# Altium PCB microGate.PcbDoc
Units mm, origin at the board's own origin, x right, y up, seen from the top; angles counter-clockwise.
Board outline 93.98 x 57.15 mm, 2 copper layers (Top Layer, Bottom Layer); 58 components, 45 nets, 214 pads, 108 vias.
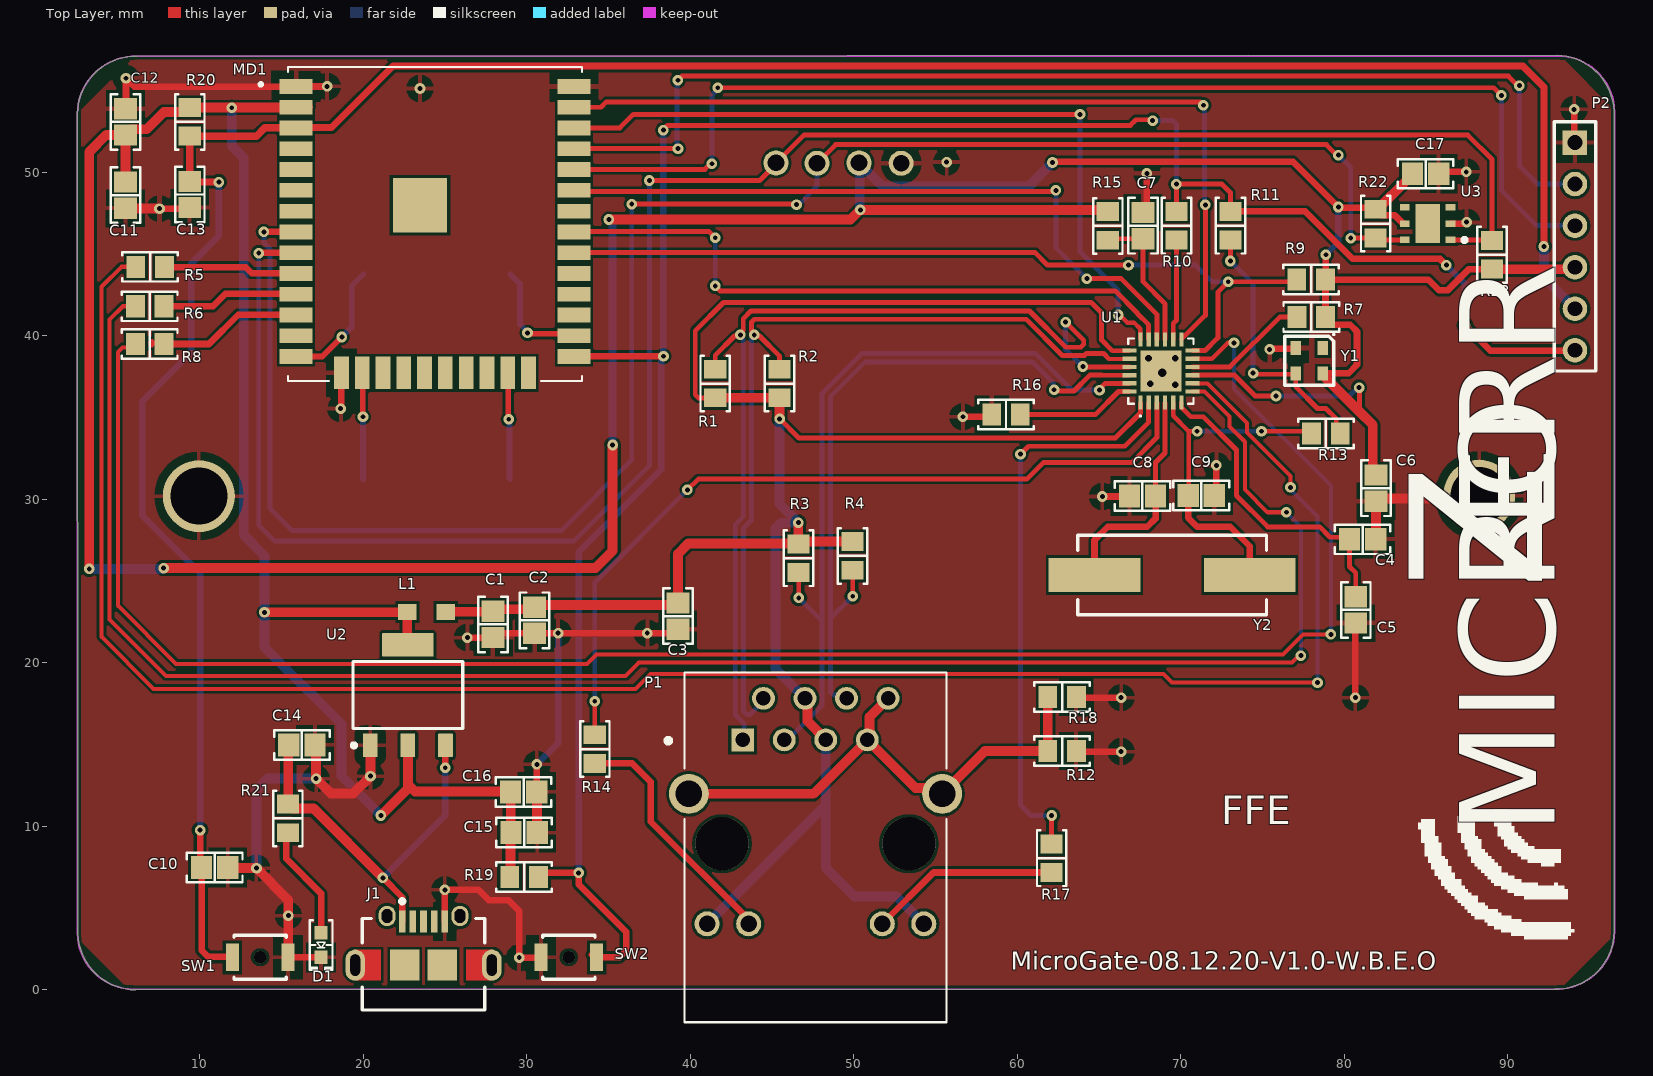
[diagram p0: Top Layer view]
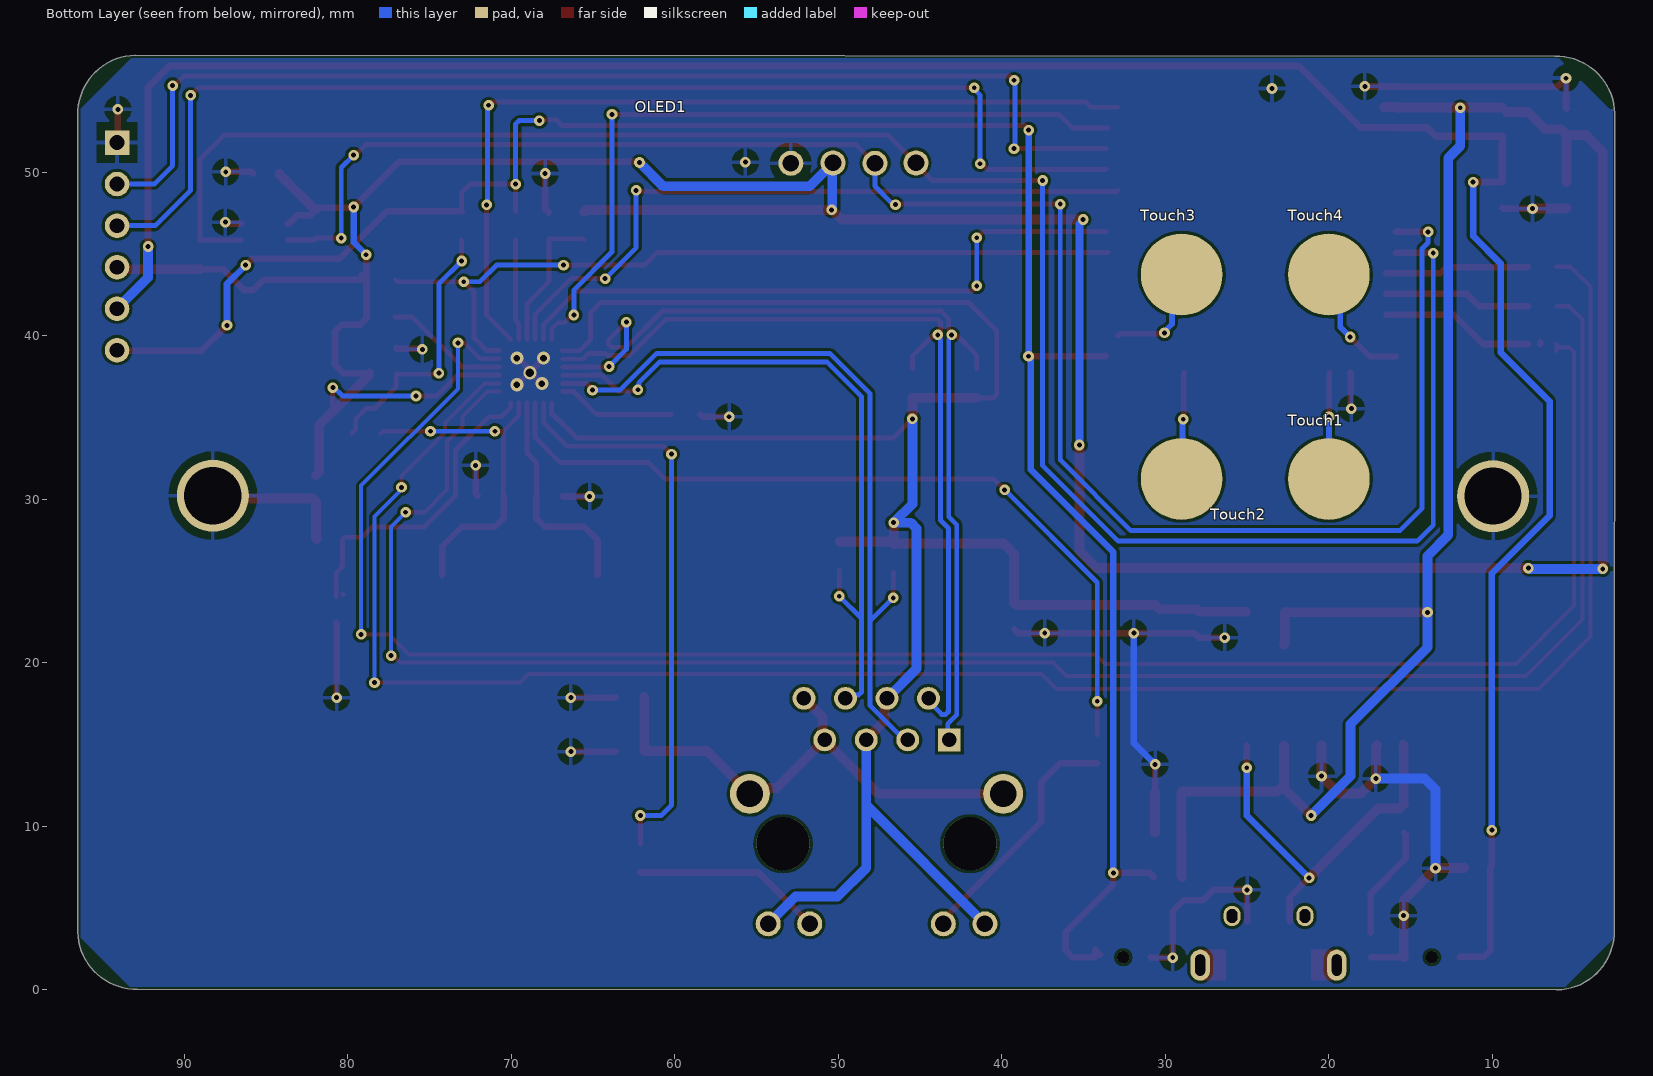
[diagram p1: Bottom Layer view, seen from below]
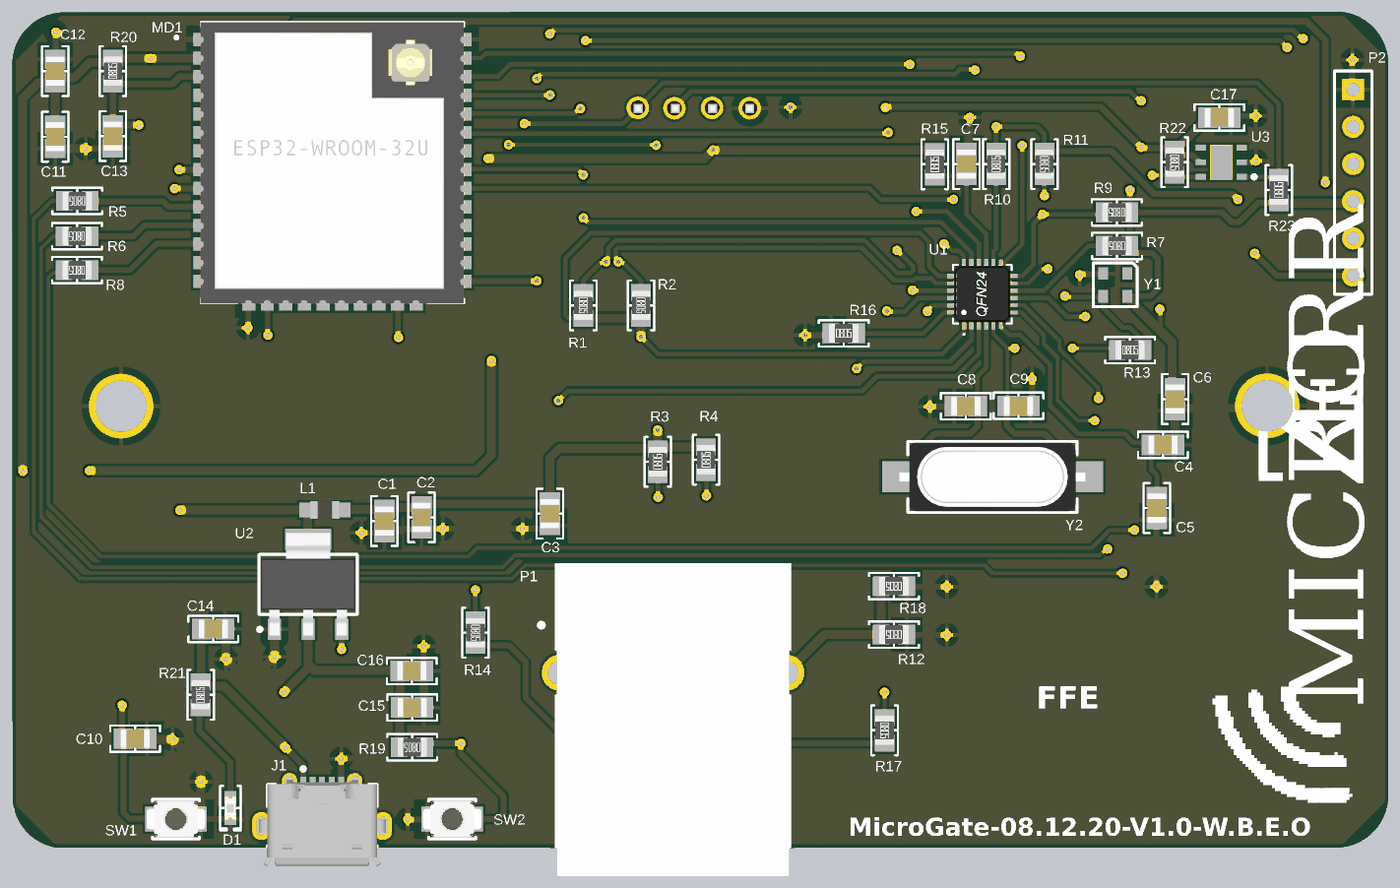
[diagram p2: 3D render of the assembled board from above, using the file's embedded part models]

## Layer stack, top to bottom
Top Solder: solder mask 0.0102, Solder Resist, Dk 3.5
Top Layer: signal copper 0.0356
Dielectric 1: dielectric 0.32, FR-4, Dk 4.8
Bottom Layer: signal copper 0.0356
Bottom Solder: solder mask 0.0102, Solder Resist, Dk 3.5

## Board outline
2.55,3.65 ccw(c6.125,3.575) 6.05,0 92.85,0.05 ccw(c92.925,3.625) 96.5,3.55 96.5,53.5 ccw(c92.925,53.575) 93,57.15 6.175,57.1 ccw(c6.1,53.525) 2.525,53.6

## Design rules (kind name [scope] priority, off if disabled: settings)
Clearance [All] p1: gap=0.175 ignorepadtopadclearanceinfootprint=FALSE except(0: Arc-Hole Track-Hole SMDPad-Hole THPad-Hole Via-Hole Fill-Hole Poly-Hole Region-Hole Text-Hole)
DiffPairsRouting [All] p1: maxlimit=0.203 minlimit=0.203 mostfreqgap=0.203 toplayer_minwidth=0.25 toplayer_maxwidth=0.3 toplayer_prefwidth=0.3 bottomlayer_minwidth=0.25 bottomlayer_maxwidth=0.3 bottomlayer_prefwidth=0.3 maxuncoupledlength=12.7
HoleSize [All] p1: absolutevalues=TRUE maxlimit=5 minlimit=0.2 maxpercent=80.000 minpercent=20.000
MatchedLengths DiffPair_diffRDMatchedLengths [InDifferentialPairClass('diffRD')] p1: tolerance=25.4 checknetsindiffpair=FALSE checkdiffpairvsdiffpair=TRUE checkxsignals=TRUE checkothers=TRUE
MinimumSolderMaskSliver [All] p1: minsoldermaskwidth=0.001
PlaneClearance [All] p1: clearance=0.5
PlaneConnect [All] p1: planeconnectstyle=Relief reliefexpansion=0.5 reliefentries=4 reliefconductorwidth=0.3 reliefairgap=0.4
PolygonConnect [All] p1: connectstyle=Relief reliefconductorwidth=0.251 reliefentries=4 polygonreliefangle="90 Angle" airgapwidth=0.5
RoutingVias [All] p1: holewidth=0.274 width=0.649 viastyle="Through Hole" minholewidth=0.3 minwidth=0.495 maxholewidth=3 maxwidth=3
SilkToSilkClearance [All] p1: silktosilkclearance=0.15
SilkToSolderMaskClearance [IsPad] p1: minsilkscreentomaskgap=0.001 clearancetoexposedcopper=TRUE
SolderMaskExpansion [All] p1: expansion=0.102 istentingtop=FALSE
Width [All] p1: maxlimit=0.6 minlimit=0.22 preferedwidth=0.4 minimp=50.000000 maximp=50.000000 favimp=50.000000
23 further rules are at their usual default settings.

## Classes and differential pairs
differential pair class diffTD: TD
differential pair class diffRD: RD
differential pair TD: +TD_P -TD_N
differential pair RD: +RD_P -RD_N

## Components (designator, comment, footprint, x,y, rotation, side; value= is the part's Value field where it differs from the comment)
C1 "104 (0.1uF" "CAP 0805_2012" 27.94,22.352 r90 top
C2 "104 (0.1uF" "CAP 0805_2012" 30.48,22.606 r90 top
C3 "0.022µF" "CAP 0805_2012" 39.243,22.86 r90 top
C4 "105 (1uF)" "CAP 0805_2012" 81.115,27.559 r180 top
C5 "470pF" "CAP 0805_2012" 80.696,23.241 r90 top
C6 "104 (0.1uF" "CAP 0805_2012" 81.94,30.683 r90 top
C7 "104 (0.1uF" "CAP 0805_2012" 67.691,46.736 r270 top
C8 "30pF" "CAP 0805_2012" 67.653,30.201 r0 top
C9 "30pF" "CAP 0805_2012" 71.247,30.226 r180 top
C10 "0.1uF" "CAP 0805_2012" 10.922,7.493 r180 top
C11 "0.22uF" "CAP 0805_2012" 5.461,48.603 r90 top
C12 "0.22uF" "CAP 0805_2012" 5.461,53.086 r270 top
C13 "0.1uF" "CAP 0805_2012" 9.398,48.641 r90 top
C14 "10uF" "CAP 0805_2012" 16.256,14.986 r180 top
C15 "10uF" "CAP 0805_2012" 29.84,9.623 r180 top
C16 "100nF" "CAP 0805_2012" 29.814,12.112 r180 top
C17 "100nF" "CAP 0805_2012" 84.963,49.911 r0 top
D1 "Green" "LED 0603_1608 GREEN" 17.425,2.75 r270 top
J1 "47589-0001" MOLX-47589-0001_V 23.691,3.024 r0 top
L1 "FB/600R/2A" SMD-0805 23.876,23.114 r0 top
MD1 "WROOM 32U" "ESP32 WROOM 32U" 14.577,36.337 r0 top
OLED1 "OLED I2C" "OLED I2C" 62.525,25.075 r180 bottom
P1 "Net_Port" HR911105A 56.933,19.695 r180 top
P2 "Header 6" HDR1X6 94.1,51.82 r270 top
R1 "49.9 R" "RES 0805_2012" 41.529,37.084 r270 top
R2 "49.9 R" "RES 0805_2012" 45.466,37.084 r270 top
R3 "49.9 R" "RES 0805_2012" 46.609,26.402 r90 top
R4 "49.9 R" "RES 0805_2012" 49.911,26.543 r90 top
R5 "100 Ohms" "RES 0805_2012" 6.973,44.221 r180 top
R6 "100 Ohms" "RES 0805_2012" 6.948,41.808 r180 top
R7 "100 Ohms" "RES 0805_2012" 77.978,41.148 r180 top
R8 "100 Ohms" "RES 0805_2012" 6.948,39.497 r180 top
R9 "4.7k R" "RES 0805_2012" 77.964,43.434 r180 top
R10 "33R" "RES 0805_2012" 69.723,46.736 r90 top
R11 "33R" "RES 0805_2012" 73.025,46.736 r270 top
R12 "33R" "RES 0805_2012" 62.738,14.605 r180 top value=0R
R13 "33R" "RES 0805_2012" 78.867,34.036 r0 top
R14 "33R" "RES 0805_2012" 34.163,14.732 r270 top value=330R
R15 "33R" "RES 0805_2012" 65.532,46.722 r90 top value="4.7k R"
R16 "33R" "RES 0805_2012" 59.309,35.179 r0 top value="12.1k R"
R17 "33R" "RES 0805_2012" 62.103,8.06 r270 top value=330R
R18 "33R" "RES 0805_2012" 62.738,17.907 r180 top value=0R
R19 "33R" "RES 0805_2012" 29.84,6.905 r180 top value="10k R"
R20 "33R" "RES 0805_2012" 9.398,53.086 r90 top value="10k R"
R21 "33R" "RES 0805_2012" 15.392,10.49 r90 top value="2k R"
R22 "33R" "RES 0805_2012" 81.915,46.863 r270 top value="4.7k R"
R23 "33R" "RES 0805_2012" 89.027,44.958 r90 top value=4.7kR
SW1 "" FP-B3U-1000P-B-MFG 13.703,2 r180 top
SW2 "" FP-B3U-1000P-B-MFG 32.575,2 r0 top
Touch1 "Touch 1" Touch#1 24.5,31.25 r90 bottom
Touch2 "Touch 1" Touch#2 29,31.25 r90 bottom
Touch3 "Touch 1" Touch#2 29,43.75 r90 bottom
Touch4 "Touch 1" Touch#2 20,43.75 r90 bottom
U1 "LAN8720" "LAN8720 FOOT" 71.45,35.179 r90 top
U2 "LM1117MP-3.3/NOPB" DCY0004A_L 22.733,18.034 r90 top
U3 "SHT20" SENS-SHT2X-6_V 85.09,46.863 r180 top
Y1 "50MHz" "ABRACON ASDMB" 77.851,38.481 r180 top
Y2 "25MHz" "ABRACON ABLS" 69.469,25.375 r0 top

## Footprints (in the part's own frame and the unit in brackets; to place one, negate y for a bottom-side part, rotate by r counter-clockwise, add the part's x,y. Pads: shape width x height; smd on the part's side, far side on the other; paste and mask are expansions set on the pad)
"ABRACON ABLS" [mm] "Crystal, 2-Leads, Body 4.70x11.40mm, Pitch 8.80mm, IPC Medium Density"
  rect 5.6x2.1 smd mask+0.01: 1(-4.75,0) 2(4.75,0)
  silkscreen extent -5.77,-2.43 5.77,2.43, body extent -6.35,-2.35 6.35,2.35, height 4.2
"ABRACON ASDMB" [mm] "MEMS Clock, 4-Leads, Body 2.00x2.45mm, Pitch 1.65mm, IPC Medium Density"
  rect 0.65x0.85 smd mask+0.01: 1(-0.825,-0.775) 2(0.825,-0.775) 3(0.825,0.775) 4(-0.825,0.775)
  silkscreen extent -1.55,-1.65 1.5,1.5, body extent -1.25,-1.05 1.25,1.05, height 0.85
"CAP 0805_2012" [mm] "Chip Capacitor, 2-Leads, Body 2.00x1.20mm, IPC Medium Density"
  rect 1.3x1.4 smd mask+0.01: 1(-0.8,0) 2(0.8,0)
  silkscreen extent -1.7,-0.9 1.7,0.9, body extent -1,-0.64 1,0.64, height 1.26
DCY0004A_L [mm] "SOT223, 4-Leads, Body 6.7x3.7mm, Pitch 2.3mm, IPC High Density"
  rrect11% 1.45x0.9 smd mask+0.01: 1(-3.075,2.3) 2(-3.075,0) 3(-3.075,-2.3)
  rrect7% 1.45x3.15 smd mask+0.01: 4(3.075,0)
  silkscreen extent -3.2,-3.35 2.05,3.42, body extent -3.5,-3.25 3.5,3.25, height 1.62
"ESP32 WROOM 32U" [mm]
  rect 2x0.9 smd mask+0.01: 1(1.316,18.908) 2(1.316,17.638) 3(1.316,16.368) 4(1.316,15.098) 5(1.316,13.828) 6(1.316,12.558) 7(1.316,11.288) 8(1.316,10.018) 9(1.316,8.748) 10(1.316,7.478) 11(1.316,6.208) 12(1.316,4.938) 13(1.316,3.668) 14(1.316,2.398) 25(18.316,2.398) 26(18.316,3.668) 27(18.316,4.938) 28(18.316,6.208) 29(18.316,7.478) 30(18.316,8.748) 31(18.316,10.018) 32(18.316,11.288) 33(18.316,12.558) 34(18.316,13.828) 35(18.316,15.098) 36(18.316,16.368) 37(18.316,17.638) 38(18.316,18.908)
  rect 0.9x2 smd mask+0.01: 15(4.101,1.398) 16(5.371,1.398) 17(6.641,1.398) 18(7.911,1.398) 19(9.181,1.398) 20(10.451,1.398) 21(11.721,1.398) 22(12.991,1.398) 23(14.261,1.398) 24(15.531,1.398)
  rect 3.33x3.33 smd mask+0.01: GND(8.9,11.65)
  silkscreen extent -0.93,0.9 18.82,20.1, body extent 0.75,0.84 18.82,20.08, height 3.4
FP-B3U-1000P-B-MFG [mm]
  rect 0.8x1.7 smd paste+0 mask+0.01: 1(-1.7,0) 2(1.7,0)
  round 0.75 hole 0.75 unplated paste-1000 mask+0.01: ""(0,0)
  silkscreen extent -1.6,-1.35 1.6,1.35, body extent -2.2,-1.45 2.2,1.45, height 0.25
HDR1X6 [mm] "Connector; Header; 6 Position"
  rect 1.5x1.5 hole 0.9 mask+0.01: 1(0,0)
  round 1.5 hole 0.9 mask+0.01: 2(2.54,0) 3(5.08,0) 4(7.62,0) 5(10.16,0) 6(12.7,0)
  silkscreen extent -1.27,-1.27 13.97,1.27
HR911105A [mm]
  rect 1.398x1.398 hole 0.89 mask+0.01: 1(13.725,4.4)
  round 1.398 hole 0.89 mask+0.01: 2(12.455,1.86) 3(11.185,4.4) 4(9.915,1.86) 5(8.645,4.4) 6(7.375,1.86) 7(6.105,4.4) 8(4.835,1.86)
  round 1.53 hole 1.02 mask+0.01: 9(15.9,15.65) 10(13.36,15.65) 11(5.19,15.65) 12(2.65,15.65)
  round 2.445 hole 1.63 mask+0.01: 13(17.02,7.7) 14(1.53,7.7)
  round 3.25 hole 3.25 unplated mask+0.01: ""(3.56,10.75) ""(14.99,10.75)
  silkscreen extent 1.27,0.27 18.42,21.67, body extent 1.33,0.2 17.21,21.6, height 13.7
"LAN8720 FOOT" [mm]
  rrect7% 0.86x0.26 smd mask+0.032: 1(0.732,3.917) 2(0.732,3.417) 3(0.732,2.917) 4(0.732,2.417) 5(0.732,1.917) 6(0.732,1.417) 13(4.602,1.417) 14(4.602,1.917) 15(4.602,2.417) 16(4.602,2.917) 17(4.602,3.417) 18(4.602,3.917)
  rrect7% 0.26x0.86 smd mask+0.032: 7(1.417,0.732) 8(1.917,0.732) 9(2.417,0.732) 10(2.917,0.732) 11(3.417,0.732) 12(3.917,0.732) 19(3.917,4.602) 20(3.417,4.602) 21(2.917,4.602) 22(2.417,4.602) 23(1.917,4.602) 24(1.417,4.602)
  rect 2.5x2.5 smd mask+0.032: 25(2.667,2.667)
  silkscreen extent -0.13,0.67 4.67,4.67, body extent 0.68,0.67 4.67,4.67, height 0.65
"LED 0603_1608 GREEN" [mm] "Chip Diode, 2-Leads, Body 1.60x0.80mm, IPC Medium Density"
  rect 0.8x0.8 smd mask+0.01: 1(-0.75,0) 2(0.75,0)
  silkscreen extent -1.52,-0.7 1.52,0.7, body extent -0.8,-0.4 0.8,0.4, height 0.53
MOLX-47589-0001_V [mm] "SMD, 5-Leads, Body 7.5x5.6mm, Pitch 0.65mm"
  rect 0.4x1.35 smd mask+0.01: 1(-1.3,1.175) 2(-0.65,1.175) 3(0,1.175) 4(0.65,1.175) 5(1.3,1.175)
  oval 1.05x1.25 hole 0.65 slot 0.85 at 90 deg mask+0.01: 6(-2.225,1.5) 7(2.225,1.5)
  oval 1.2x1.9 hole 0.6 slot 1.3 at 90 deg mask+0.01: 8(-4.175,-1.5) 11(4.175,-1.5)
  rect 1.8x1.9 smd mask+0.01: 9(-1.15,-1.5) 10(1.15,-1.5)
  Top Layer region: 2.6,-2.45 4.175,-2.45 4.175,-0.55 2.6,-0.55
  Top Layer region: -2.6,-0.55 -4.175,-0.55 -4.175,-2.45 -2.6,-2.45
  silkscreen extent -3.75,-4.25 3.75,2.52, body extent -4.32,-4.25 4.32,1.64, height 2.74
"OLED I2C" [mm]
  round 1.53 hole 1.02 mask+0.01: 1(9.627,25.476) 2(12.2,25.5) 3(14.775,25.475) 4(17.275,25.5)
  body extent 0.1,-0.05 26.8,27.81, height 7.47
"RES 0805_2012" [mm] "Chip Resistor, 2-Leads, Body 2.00x1.25mm, IPC Medium Density"
  rect 1.15x1.35 smd mask+0.01: 1(-0.875,0) 2(0.875,0)
  silkscreen extent -1.7,-0.9 1.7,0.9, body extent -1,-0.62 1,0.63, height 0.6
SENS-SHT2X-6_V [mm] "DFN, 6-Leads, Body 3x3mm, Pitch 1mm, Exposed Pad 2.4x1.5mm"
  rect 0.6x0.4 smd paste-0.6 mask+0.01: 1(-1.4,1) 2(-1.4,0) 3(-1.4,-1) 4(1.4,-1) 5(1.4,0) 6(1.4,1)
  rect 1.5x2.4 smd paste-0.05 mask+0.01: 7(0,0)
  silkscreen extent -2.38,0.88 -2.13,1.12, body extent -1.5,-1.5 1.5,1.5, height 1.1
SMD-0805 [mm] "Chip Inductor, 2-Leads, Body 2.0x1.2mm"
  rect 1.15x1 smd mask+0.01: 1(-1.175,0) 2(1.175,0)
  body extent -1,-0.6 1,0.6, height 0.89
Touch#1 [mm]
  round 5 smd mask+0.01: 1(0,-4.5)
Touch#2 [mm]
  round 5 smd mask+0.01: 1(0,0)

## Part data
C1 C2 C3 C4 C5 C6 C7 C8 C9 C10 C11 C12 C13 C14 C15 C16 C17: library part C0805C220J5RAC7800, "CAP CER SMD 0805 22PF 5% 50V X7R", Capacitance=22pF, Device Package="0805 (2012 Metric)", Manufacturer=KEMET, Operating Temperature="-55°C ~ 125°C", Supplier Part Number 1=399-17625-1-ND, Temperature Coefficient=X7R, Tolerance=±5%, Voltage - Rated=50V, Applications="Bypass, Decoupling", ComponentLink1Description=Datasheet, ComponentLink1URL=https://api.kemet.com/component-edge/download/datasheet/C0805C220J5RAC7800.pdf, ComponentLink2Description="DigiKey Link", ComponentLink2URL=http://digikey.com/product-detail/en/kemet/C0805C220J5RAC7800/399-17625-1-ND/8572625, LastUpdated="02.09.2020 01:04:09", Lifecycle Status=Active, Minimum Order=1, Mounting Type="Surface Mount, MLCC", Package / Case="0805 (2012 Metric)", Packaging=TapeAndReel, PartId=17442, Part Number=C0805C220J5RAC7800, Part Status=Active, Price=0.03, Series="SMD Comm X7R", Size / Dimension="0.079\" L x 0.049\" W (2.00mm x 1.25mm)", Supplier 1=DigiKey, Thickness (Max)="0.035\" (0.88mm)"
D1: library part BG1111C-TR, "LED GREEN DIFFUSED 1608 SMD", Current - Test=20mA, Device Package="0603 (1608 Metric)", Lens Color=White, Manufacturer="Stanley Electric Co", Millicandela Rating=2.4mcd, Supplier Device Package=1608, Supplier Part Number 1=404-1005-1-ND, Voltage - Forward (Vf) (Typ)=2.1V, Color=Green, ComponentLink1Description=Datasheet, ComponentLink1URL=http://www.stanley-components.com/php/downloaddatafile.php?rp=h1111c_e.pdf, ComponentLink2Description="DigiKey Link", ComponentLink2URL=http://digikey.com/product-detail/en/stanley-electric-co/BG1111C-TR/404-1005-1-ND/428888, Configuration=Standard, Height (Max)=0.90mm, LastUpdated="02.09.2020 01:20:42", Lens Size="1.10mm x 0.80mm", Lens Style="Rectangle with Flat Top", Lens Transparency=Diffused, Lifecycle Status=Active, Minimum Order=1, Mounting Type="Surface Mount", Package / Case="0603 (1608 Metric)", Packaging=TapeAndReel, PartId=669, Part Number=BG1111C-TR, Part Status=Active, Price=0.09, Series=1111C, Size / Dimension="1.60mm L x 0.80mm W", Supplier 1=DigiKey, Viewing Angle="153°, 146°", Wavelength - Dominant=558nm, Wavelength - Peak=555nm
J1: library part CMP-2000-05610-1, "Right Angle Female Type AB Micro USB Connector, 30 V, 1.8 A, -30 to 85 degC, RoHS, Tape and Reel", Color=Black, Current Rating=1.8A, Manufacturer=Molex, Operating Temperature Range=-20Cto+85C, Package Description="Micro USB Connector, Pitch 0.65 mm, 5 Positions, Body 7.5 x 5.6 mm", Voltage Rating=30VAC, =0475890001, Brand=Molex, Connector Type=MicroUSBTypeABreceptacle, Contact Material=CopperAlloy, Contact Plating=Gold, Datasheet URL=http://www.molex.com/webdocs/datasheets/pdf/en-us/0475890001_IO_CONNECTORS.pdf, Datasheet Version=12/2016, Gender=Female, Manufacturer URL=http://www.molex.com/, Mounting Angle=Right, Mounting Technology=SurfaceMount, Number of Contacts=5Contact, Number of Ports=1Port, Package Reference=47589-0001, Package URL=http://www.molex.com/pdm_docs/sd/475890001_sd.pdf, Packaging=Reel, Product=MicroUSBTypeABConnectors, Product Category=USBConnectors, RoHS=True, Series=47589, Standard=USB, Termination Style=SMD/SMT
L1: library part CMP-0220-00032-1, "İsmi : 742792040 SMD EMI Suppression Ferrite Bead WE-CBF, Z = 600 Ohm", ComponentLink1Description="Manufacturer Link", ComponentLink1URL=http://www.we-online.com, ComponentLink2Description=Datasheet, ComponentLink2URL=http://www.we-online.de/katalog/media/pdf/742792040.pdf, DatasheetVersion=Dec-2005, Impedance="600 Ohm", PackageDescription="Chip Inductor, 2-Leads, Body 2.0 x 1.2 mm", PackageReference=SMD-0805, PackageVersion=2005
MD1: library part "ESP32 WROOM 32U"
P1: library part HR911105A
P2: "Header, 6-Pin", LatestRevisionDate=17-Jul-2002, LatestRevisionNote="Re-released for DXP Platform.", Publisher="Altium Limited"
R1 R2 R3 R4 R9 R10 R11 R12 R13 R14 R15 R16 R17 R18 R19 R20 R21 R22 R23: library part RPC0805JT100R-UP, "RES, PULSE, 0805, 5%, 100 OHM, 0", Device Package="0805 (2012 Metric)", Manufacturer="Stackpole Electronics Inc", Operating Temperature="-55°C ~ 155°C", Power (Watts)="0.5W, 1/2W", Ratings=AEC-Q200, Resistance="100 Ohms", Supplier Device Package=0805, Supplier Part Number 1=RPC0805JT100R-UPCT-ND, Temperature Coefficient=±200ppm/°C, Tolerance=±5%, ComponentLink1Description=Datasheet, ComponentLink1URL=https://www.seielect.com/catalog/sei-rpc.pdf, ComponentLink2Description="DigiKey Link", ComponentLink2URL=http://digikey.com/product-detail/en/stackpole-electronics-inc/RPC0805JT100R-UP/RPC0805JT100R-UPCT-ND/10109071, Composition="Thick Film", Features="Automotive AEC-Q200, Pulse Withstanding", Height - Seated (Max)="0.024\" (0.60mm)", LastUpdated="02.09.2020 01:15:08", Lifecycle Status=Active, Minimum Order=1, Number of Terminations=2, Package / Case="0805 (2012 Metric)", Packaging=TapeAndReel, PartId=35188, Part Number=RPC0805JT100R-UP, Part Status=Active, Price=0.02, Series=RPC, Size / Dimension="0.079\" L x 0.049\" W (2.00mm x 1.25mm)", Supplier 1=DigiKey
R5 R6 R7 R8: library part RPC0805JT100R-UP, "RES, PULSE, 0805, 5%, 100 OHM, 0", Device Package="0805 (2012 Metric)", Manufacturer="Stackpole Electronics Inc", Operating Temperature="-55°C ~ 155°C", Power (Watts)="0.5W, 1/2W", Ratings=AEC-Q200, Supplier Device Package=0805, Supplier Part Number 1=RPC0805JT100R-UPCT-ND, Temperature Coefficient=±200ppm/°C, Tolerance=±5%, ComponentLink1Description=Datasheet, ComponentLink1URL=https://www.seielect.com/catalog/sei-rpc.pdf, ComponentLink2Description="DigiKey Link", ComponentLink2URL=http://digikey.com/product-detail/en/stackpole-electronics-inc/RPC0805JT100R-UP/RPC0805JT100R-UPCT-ND/10109071, Composition="Thick Film", Features="Automotive AEC-Q200, Pulse Withstanding", Height - Seated (Max)="0.024\" (0.60mm)", LastUpdated="02.09.2020 01:15:08", Lifecycle Status=Active, Minimum Order=1, Number of Terminations=2, Package / Case="0805 (2012 Metric)", Packaging=TapeAndReel, PartId=35188, Part Number=RPC0805JT100R-UP, Part Status=Active, Price=0.02, Resistance="100 Ohms", Series=RPC, Size / Dimension="0.079\" L x 0.049\" W (2.00mm x 1.25mm)", Supplier 1=DigiKey
SW1 SW2: library part CMP-08834-000005-1, "SWITCH TACTILE SPST-NO 0.05A 12V", Ambient Temperature Range High=+70°C, Ambient Temperature Range Low=-25°C, Contact Current Rating=50mA, Contact Resistance=100m?, Manufacturer=Omron, Manufacturer Part Number=B3U-1000P-B, Operating Force=1.5N, Package=0, Temperature="-25°C to +70°C", Voltage Rating Dc=12V, Automotive=No, Category=Switch, ComponentLink2Description=Datasheet, ComponentLink2URL=https://omronfs.omron.com/en_US/ecb/products/pdf/en-b3u.pdf, Device Class L1=Electromechanical, Device Class L2=Switches, Device Class L3="Tactile Switches", Digikey Description="SWITCH TACTILE SPST-NO 0.05A 12V", Electromechanical Life=200000Cycles, Height=1.75mm, Lead Free=Yes, Mount="Surface Mount", Mouser Description="Tactile Switches Top Actuated with boss w/o ground", Octopart=https://octopart.com/b3u-1000p-b-omron-1057356, RoHS=TRUE, Temperature Range High=+70°C, Temperature Range Low=-25°C, Throw Configuration=SPST-NO
U2: library part CMP-0062-01638-4, "800mA Low-Dropout Linear Regulator, 4-pin SOT-223, Pb-Free", Manufacturer="Texas Instruments", PackageTopMarking=XYTT*N05A, PowerWise=N, Code_IPC=SOT223-4, Code_JEDEC=TO-261-AA, ComponentLink1Description="Datasheet URL", ComponentLink1URL=http://www.ti.com/general/docs/lit/getliterature.tsp?genericPartNumber=LM1117-N&fileType=pdf, CompType="LDO IC", High-Reliability=Y, PackageDescription="Molded SOT-223, 6.50 x 3.56 x 1.6mm Body, 4 Lead, 2.3mm Pitch", PackageReference=DCY0004A, PartNumber=LM1117MP-3.3/NOPB, PinCount=4, RoHS=Y
U3: library part CMP-2000-05344-1, "Humidity and Temperature Sensor IC, 2.1 to 3.6 V, -40 to 125 degC, 6-Pin DFN, RoHS, Tape and Reel", Manufacturer=Sensirion-AG, Operating Temperature=-40degC~125degC, Voltage - Supply=2.1V~3.6V, Accuracy=±3%RH, Category=Sensors,Transducers, Datasheet URL=http://datasheet.octopart.com/SHT20-Sensirion-datasheet-32015022.pdf, Datasheet Version="Rev. 4, 05/2014", Family=Humidity,MoistureSensors, Humidity Range=0~100%RH, Manufacturer URL=http://www.sensirion.com/, Mounting Type=SurfaceMount, Output=12b, Output Type=I²C, Response Time=8s, Sensitivity=-, Sensor Type=Humidity,Temperature, Series=-
Y1: library part ASDMB-50.000MHZ-EC-T, "MEMS OSC XO 50.0000MHZ LVCMOS", Current - Supply (Max)=16mA, Frequency Stability=±50ppm, Manufacturer="Abracon LLC", Operating Temperature="-20°C ~ 70°C", Package / Case="4-SMD, No Lead", Supplier Part Number 1=535-12143-1-ND, Voltage - Supply="1.8V ~ 3.3V", Base Resonator=MEMS, ComponentLink1Description=Datasheet, ComponentLink1URL=https://abracon.com/Oscillators/ASDMB.pdf, ComponentLink2Description="DigiKey Link", ComponentLink2URL=http://digikey.com/product-detail/en/abracon-llc/ASDMB-50.000MHZ-EC-T/535-12143-1-ND/4199768, Frequency=50MHz, Function="Standby (Power Down)", Height - Seated (Max)="0.035\" (0.90mm)", LastUpdated="02.09.2020 01:21:50", Lifecycle Status=Active, Minimum Order=1, Mounting Type="Surface Mount", Output=LVCMOS, Packaging=TapeAndReel, PartId=65, Part Number=ASDMB-50.000MHZ-EC-T, Part Status=Active, Price=1.35, Series="ASDMB, Pure Silicon™", Size / Dimension="0.098\" L x 0.079\" W (2.50mm x 2.00mm)", Supplier 1=DigiKey, Type="XO (Standard)"
Y2: library part ABLS-25.000MHZ-D-FT, "CRYSTAL 25.000MHZ 18PF SMD", ESR (Equivalent Series Resistance)="40 Ohms", Frequency Stability=±50ppm, Load Capacitance=18pF, Manufacturer="Abracon LLC", Operating Mode=Fundamental, Operating Temperature="-40°C ~ 85°C", Package / Case=HC-49/US, Supplier Part Number 1=535-14356-1-ND, ComponentLink1Description=Datasheet, ComponentLink1URL=https://abracon.com/Resonators/abls.pdf, ComponentLink2Description="DigiKey Link", ComponentLink2URL=http://digikey.com/product-detail/en/abracon-llc/ABLS-25.000MHZ-D-FT/535-14356-1-ND/8582117, Frequency=25MHz, Frequency Tolerance=±50ppm, Height - Seated (Max)="0.165\" (4.20mm)", LastUpdated="02.09.2020 01:21:46", Lifecycle Status=Active, Minimum Order=0, Mounting Type="Surface Mount", Packaging=TapeAndReel, PartId=19, Part Number=ABLS-25.000MHZ-D-FT, Part Status=Active, Price=0.18, Series=ABLS, Size / Dimension="0.449\" L x 0.185\" W (11.40mm x 4.70mm)", Supplier 1=DigiKey, Type="MHz Crystal"

## Free pads (board coordinates)
  round 4.4 hole 3.5 mask+0.01: 1(9.957,30.201) 1(88.24,30.226)

## Via types
v1: diameter 0.649, hole 0.3, Top Layer to Bottom Layer, 103 vias
v2: diameter 0.8, hole 0.4, Top Layer to Bottom Layer, 4 vias
v3: diameter 0.8, hole 0.5, Top Layer to Bottom Layer, 1 vias

## Nets (pads, with @x,y where several pads share a name; then routed paths per layer and width w, separated by ;. In a path a pad name is that pad's centre, name@x,y a point inside that pad or via, vN(x,y) a via of type N, cw(c..) or ccw(c..) an arc to the next point about the centre after c; other vN are vias at no path point)
3.3V: C6.2 C11.2 C12.2 C15.2 C16.2 C17.1 L1.1 MD1.2 OLED1.2 P2.4 R7.1 R9.1 R15.2 R19.2 R20.2 R22.1 R23.1 U1.9 U2.2 U2.4 U3.5 Y1.4 | length 293.1
  Top Layer w0.305: U1.9 70.722,37.592 73.279,37.592 74.549,36.322 v1(75.819,36.322) ; v1(80.899,36.83) 80.937,36.792 80.937,35.345
  Top Layer w0.4: v1(62.155,50.598) 62.207,50.65 76.858,50.65 v1(79.629,47.879) 79.677,47.831 81.822,47.831 R22.1 82.29,47.363 83.09,47.363 83.59,46.863 U3.5 ; Y1.4 78.689,37.719 80.264,37.719 80.772,38.227 80.772,40.259 80.358,40.673 79.228,40.673 78.846,41.055 78.846,43.427 R9.1 ; v1(78.867,44.958) 78.853,44.944 R9.1@78.853,43.448 ; R9.1@79.127,43.722 R9.1@78.853,43.448 ; R23.1 87.619,44.083 86.309,42.774 85.801,42.774 85.141,43.434 R9.1 ; R9.1 R9.1@78.853,43.448
  Top Layer w0.6: v1(3.25,25.75) 3.25,51.25 4.286,52.286 C12.2 ; C11.2 C12.2 ; v1(7.8,25.8) 34.2,25.8 35.255,26.855 v1(35.255,33.325) ; R20.2@9.123,53.686 7.823,53.686 6.773,52.636 5.811,52.636 C12.2 ; R20.2 9.404,53.955 11.958,53.955 v1(11.963,53.95) 11.973,53.959 15.854,53.959 15.893,53.999 16.628,53.999 MD1.2@16.636,54.006 ; v1(13.97,23.089) 13.979,23.098 22.685,23.098 L1.1 22.701,21.141 U2.4 ; v1(21.082,10.668) 22.733,12.319 22.733,12.573 ; U2.2 22.733,12.573 ; R19.2 29.002,6.942 29.002,9.61 29.027,9.635 29.027,12.099 C16.2 28.963,12.061 28.884,12.141 23.165,12.141 22.733,12.573 ; v1(35.027,47.117) 49.804,47.117 50.387,47.7 v1(50.4,47.7) 50.409,47.691 65.438,47.691 R15.2 ; Y1.4 78.676,37.606 80.937,35.345 81.737,34.545 81.737,31.686 C6.2 ; R22.1 82.015,47.738 83.788,49.511 83.813,49.511 84.163,49.861 C17.1 ; R23.1 89.041,44.069 93.969,44.069 P2.4
  Bottom Layer w0.305: v1(75.819,36.322) 80.301,36.322 80.809,36.83 v1(80.899,36.83)
  Bottom Layer w0.4: OLED1.2 OLED1.2@50.363,50.537 ; v1@50.363,47.738 v1(50.4,47.7) ; v1(78.867,44.958) 79.629,45.72 v1(79.629,47.879)
  Bottom Layer w0.5: v1(35.027,47.117) 35.027,47.077 35.255,46.848 v1(35.255,33.325)
  Bottom Layer w0.6: v1(3.25,25.75) 7.75,25.75 v1(7.8,25.8) ; v1(11.963,53.95) 11.963,51.613 12.7,50.876 12.7,27.813 13.97,26.543 v1(13.97,23.089) 13.97,20.955 18.669,16.256 18.669,13.081 v1(21.082,10.668) ; v1@50.363,47.738 50.363,50.537 51.758,49.142 60.699,49.142 v1(62.155,50.598)
3.3VLAN: C1.2 C2.2 C3.2 L1.2 P1.4 P1.5 P1.9 P1.12 R1.2 R2.2 R3.2 R4.2 U1.1 U1.19 | length 141.5
  Top Layer w0.3: R1.2 40.499,36.209 40.308,36.4 40.308,40.308 42.037,42.037 64.516,42.037 65.151,41.402 65.151,39.751 65.811,39.091 66.843,39.091 U1.19 ; v1(45.466,34.925) 46.641,33.75 66,33.75 67.533,35.283 U1.1
  Top Layer w0.6: L1.2 25.07,23.133 27.921,23.133 C1.2 28.067,23.279 30.353,23.279 C2.2 30.607,23.533 39.116,23.533 C3.2 39.243,26.67 39.878,27.305 46.581,27.305 R3.2 ; R1.2 R2.2 v1(45.466,34.925) ; v1(46.609,28.575) R3.2 ; P1.4 47.171,17.683 47.171,16.439 48.288,15.322 P1.5 ; R4.2 46.75,27.418 R3.2
  Bottom Layer w0.6: P1.9 48.288,11.3 ; v1(45.466,34.925) 45.466,29.718 v1(46.609,28.575) 45.563,28.575 45.212,28.224 45.212,19.641 P1.4 ; P1.5 48.288,11.3 ; P1.12 52.613,5.715 50.038,5.715 48.288,7.465 48.288,11.3
5V: C14.2 J1.1 R21.2 U2.3 | length 24.2
  Top Layer w0.4: v1(21.209,6.858) 22.391,5.676 J1.1 ; v1(25.019,13.589) 25.026,13.596 25.026,14.952 U2.3
  Top Layer w0.6: C14.2 15.424,14.954 15.424,11.397 R21.2 15.667,11.09 16.977,11.09 v1(21.209,6.858)
  Bottom Layer w0.4: v1(21.209,6.858) 25.019,10.668 v1(25.019,13.589)
CRS_DV: MD1.12 R8.1 | length 9.5
  Top Layer w0.4: 7.073,39.497 7.073,39.597 ; R8.1 7.826,39.5 10.568,39.5 12.358,41.29 MD1.12@16.5,41.29
EN: C10.2 C13.2 MD1.3 P2.5 R20.1 SW1.2 | length 156.3
  Top Layer w0.4: v1(10.033,9.779) 10.033,7.582 C10.2 10.122,2.428 10.525,2.025 11.978,2.025 SW1.2
  Top Layer w0.45: v1(11.176,49.403) 9.436,49.403 C13.2 R20.1 13.476,52.211 13.985,52.72 MD1.3@15.757,52.72 ; MD1.3@15.893,52.736 18.065,52.736 21.829,56.5 90.9,56.5 92.202,55.198 v1(92.202,45.466)
  Bottom Layer w0.4: v1(10.033,9.779) 10.033,25.467 6.5,29 6.5,36 9.5,39 9.5,44.425 11.176,46.101 v1(11.176,49.403)
  Bottom Layer w0.6: v1(92.202,45.466) 92.202,43.558 P2.5
ESP_IO0: MD1.25 P2.6 R10.2 R11.1 R19.1 SW2.2 | length 131.5
  Top Layer w0.3: v1(38.354,52.578) 38.354,52.611 38.611,52.869 66.915,52.869 67.259,53.213 68.224,53.213 v1(68.275,53.162)
  Top Layer w0.305: R10.2 v1(69.723,49.276) 72.517,49.276 73.025,48.768 R11.1
  Top Layer w0.4: R19.1 30.973,7.163 v1(33.172,7.163) 33.172,6.468 36.075,3.565 36.075,2.4 35.675,2 SW2.2 34.275,2.45 SW2.2@33.984,2.159 ; MD1.25@33.636,38.766 33.644,38.759 38.355,38.759 v1(38.363,38.751) ; R11.1 77.611,47.611 80.518,44.704 85.852,44.704 v1(86.233,44.323) ; v1(87.376,40.64) 88.916,39.1 94.08,39.1 P2.6
  Bottom Layer w0.3: v1(68.275,53.162) 69.52,53.162 69.723,52.959
  Bottom Layer w0.305: v1(69.723,49.276) 69.723,52.959
  Bottom Layer w0.4: v1(33.172,7.163) 33.172,26.772 38.227,31.826 v1@38.227,38.735 ; v1(38.354,52.578) 38.359,52.573 38.359,38.755 v1(38.363,38.751) ; v1(86.233,44.323) 87.376,43.18 v1(87.376,40.64)
ESP_RX: MD1.34 P2.3 | length 71.9
  Top Layer w0.3: MD1.34@33.636,50.196 33.651,50.181 40.892,50.181 41.231,50.521 v1(41.326,50.521) ; v1(41.681,55.169) 42.469,55.169 89.131,55.169 v1(89.6,54.7)
  Bottom Layer w0.3: v1(41.326,50.521) 41.326,54.719 41.681,55.074 v1(41.681,55.169) ; v1(89.6,54.7) 89.6,48.9 91.76,46.74 P2.3
ESP_TX: MD1.35 P2.2 | length 70.4
  Top Layer w0.3: MD1.35@33.636,51.466 33.651,51.451 v1(39.252,51.451) ; v1(39.243,55.626) 39.497,55.88 90.026,55.88 90.606,55.3 v1(90.7,55.3)
  Bottom Layer w0.3: v1@39.116,51.435 39.179,51.498 39.179,55.562 v1(39.243,55.626) ; v1(90.7,55.3) 90.7,50.4 91.82,49.28 P2.2
GND: C1.1 C2.1 C3.1 C4.1 C5.1 C6.1 C7.1 C8.1 C9.1 C10.1 C11.1 C12.1 C13.1 C14.1 C15.1 C16.1 C17.2 D1.2 J1.5 MD1.1 MD1.15 MD1.38 OLED1.1 P2.1 pad.1 R12.1 R16.1 R18.1 SW1.1 SW2.1 U1.25 U2.1 U3.2 Y1.2 | length 122.2
  Top Layer w0.4: C12.1 5.5,53.925 v1(5.5,55.75) 6.005,55.245 MD1.1 15.895,55.247 17.797,55.247 v1(17.8,55.25) ; v1(7.55,47.775) 9.332,47.775 C13.1 ; SW1.1 D1.2 ; v1(18.625,35.55) 18.651,35.576 18.651,37.708 MD1.15 ; J1.5 24.991,6.116 v1(25,6.125) 27.05,6.125 27.675,5.5 28.875,5.5 29.542,4.833 v1(29.542,1.975) 30.85,1.975 SW2.1 ; v1(26.375,21.55) 27.938,21.55 C1.1 28.194,21.806 C2.1 30.499,21.825 v1(31.925,21.825) v1(37.37,21.825) 39.008,21.825 C3.1 ; C16.1 30.625,12.123 v1(30.625,13.8) ; v1(56.675,35.05) 58.305,35.05 R16.1 ; R12.1 63.643,14.575 v1(66.35,14.575) ; R18.1 63.645,17.875 v1(66.35,17.875) ; v1(65.2,30.175) 66.827,30.175 C8.1 ; C7.1 67.925,47.77 v1(67.925,49.925) ; v2(68.021,38.633) 68.021,38.608 U1.25 ; v2(68.123,37.084) U1.25@68.783,37.744 ; U1.25@68.809,37.846 v2(69.647,37.008) ; v3(68.859,37.744) 68.859,37.77 U1.25 ; v2(69.647,38.633) 69.571,38.633 U1.25 ; C9.1 72.175,30.354 v1(72.175,32.075) ; v1(75.425,39.175) 75.466,39.215 76.986,39.215 Y1.2 ; v1(80.675,17.875) 80.675,22.42 C5.1 ; C4.1@81.9,27.574 C4.1 ; C17.2 85.877,50.025 v1(87.45,50.025) ; U3.2 87.321,46.863 87.408,46.95 v1(87.475,46.95) ; v1(94.05,53.85) 94.05,51.87 P2.1
  Top Layer w0.6: C11.1 5.48,47.784 7.541,47.784 v1(7.55,47.775) ; C10.1 11.756,7.459 13.466,7.459 v1(13.475,7.45) 15.416,5.509 15.416,2.013 SW1.1 ; C14.1 17.116,14.926 17.116,12.934 v1(17.125,12.925) 18.036,12.014 19.389,12.014 20.442,13.067 20.442,14.95 U2.1 ; C16.1 30.627,12.099 30.627,9.635 C15.1 ; C4.1@81.9,27.574 81.928,27.602 81.928,29.87 C6.1 82.112,30.055 88.068,30.055 pad.1@88.24,30.226
  Bottom Layer w0.4: v1(30.625,13.8) 31.925,15.1 v1(31.925,21.825)
  Bottom Layer w0.6: v1(13.475,7.45) 13.475,12.256 14.148,12.929 17.121,12.929 v1(17.125,12.925)
  other v1: 15.425,4.55 20.45,13.075 55.675,50.625 23.475,55.125
GND_J48: P1.7 P1.8 P1.13 P1.14 R12.2 R18.2 | length 32.1
  Top Layer w0.6: P1.13 47.528,11.995 P1.7 ; P1.8 50.967,16.705 50.967,15.435 P1.7 ; R18.2 R12.2 58.013,14.605 P1.14 55.05,12.348 53.775,12.348 P1.7
"IO2 / TOUCH_1": MD1.24
"IO4 / TOUCH_2": MD1.26 Touch3.1 | length 6.9
  Top Layer w0.35: v1(30.048,40.183) 30.105,40.126 32.772,40.126 MD1.26
  Bottom Layer w0.35: Touch3.1 29.587,43.163 29.587,40.725 30.048,40.264 v1(30.048,40.183)
"IO12 / TOUCH_3": MD1.14 Touch4.1 | length 7.7
  Top Layer w0.35: MD1.14 17.501,38.735 v1(18.694,39.929)
  Bottom Layer w0.35: v1(18.694,39.929) 19.295,40.53 19.295,43.045 Touch4.1
"IO13 / TOUCH_4": MD1.16 Touch1.1 | length 6.5
  Top Layer w0.35: MD1.16 19.969,37.714 19.969,35.073 v1(19.99,35.052)
  Bottom Layer w0.35: v1(19.99,35.052) 19.995,35.047 19.995,31.255 Touch1.1
"IO14 / TOUCH_5": MD1.13
"IO15 / TOUCH_6": MD1.23 Touch2.1 | length 6.6
  Top Layer w0.35: MD1.23 28.872,37.701 28.872,34.933 v1(28.905,34.9)
  Bottom Layer w0.35: v1(28.905,34.9) 28.953,34.852 28.953,31.297 Touch2.1
LED1: R14.1 U1.3 | length 49.5
  Top Layer w0.3: R14.1 v1(34.163,17.653) ; v1(39.827,30.582) 40.488,31.242 60.579,31.242 61.587,32.25 67,32.25 68.533,33.783 U1.3
  Bottom Layer w0.3: v1(34.163,17.653) 34.163,24.917 v1(39.827,30.582)
LED2: R17.1 U1.2 | length 35.2
  Top Layer w0.3: v1(60.198,32.766) 60.682,33.25 66.568,33.25 68.033,34.715 U1.2 ; R17.1 v1(62.103,10.668)
  Bottom Layer w0.3: v1(60.198,32.766) 60.198,11.303 60.833,10.668 v1(62.103,10.668)
MDC: MD1.37 U1.13 | length 53.7
  Top Layer w0.3: MD1.37 34.544,53.975 34.874,54.305 71.171,54.305 v1(71.374,54.102) ; U1.13 71.501,41.249 v1(71.501,48.006)
  Bottom Layer w0.3: v1(71.374,54.102) 71.438,54.038 71.438,48.069 v1(71.501,48.006)
MDIO: MD1.30 R9.2 U1.12 | length 49.9
  Top Layer w0.3: MD1.30@33.5,45.1 33.515,45.085 61.087,45.085 61.849,44.323 v1(66.802,44.323) ; U1.12 70.728,39.106 71.495,39.106 72.263,39.874 72.263,42.672 v1(72.898,43.307) 76.962,43.307 R9.2
  Bottom Layer w0.3: v1(66.802,44.323) 70.899,44.323 71.915,43.307 v1(72.898,43.307)
NetC4_2: C4.2 C5.2 U1.6 | length 19.3
  Top Layer w0.28: U1.6 70.033,35.631 70.612,35.052 70.632,35.052
  Top Layer w0.3: 70.632,35.052 71.374,35.052 73.406,33.02 73.406,30.226 75.311,28.321 78.486,28.321 79.121,27.686 80.188,27.686 C4.2 80.315,25.882 80.696,25.502 C5.2 ; C5.2@80.264,24.168 C5.2@80.315,24.219
NetC8_2: C8.2 U1.4 Y2.1 | length 13.7
  Top Layer w0.3: C8.2 68.453,32.258 69.033,32.838 U1.4
  Top Layer w0.4: Y2.1 64.719,27.508 65.532,28.321 67.945,28.321 68.453,28.829 C8.2
NetC9_2: C9.2 R13.1 U1.5 Y2.2 | length 21.3
  Top Layer w0.254: U1.5 69.536,35.908 69.536,35.112 70.485,34.163 ; C9.2 70.485,30.264 70.485,34.163 ; v1(70.993,34.163) 70.485,34.163 ; v1(74.93,34.163) 77.865,34.163 R13.1
  Top Layer w0.4: C9.2 70.447,28.867 70.993,28.321 73.025,28.321 74.219,27.127 Y2.2
  Bottom Layer w0.254: v1(70.993,34.163) v1(74.93,34.163)
NetD1_1: D1.1 R21.1 | length 7
  Top Layer w0.4: R21.1 15.291,9.514 15.291,8.034 17.425,5.9 D1.1
NetP1_10: P1.10 R14.2 | length 15.1
  Top Layer w0.4: R14.2 36.455,13.857 37.592,12.72 37.592,10.287 43.573,4.306 P1.10
NetP1_11: P1.11 R17.2 | length 11.7
  Top Layer w0.4: P1.11 54.883,7.185 R17.2
NetR5_2: R5.2 U1.8 | length 122.3
  Top Layer w0.254: R5.2 5.221,44.221 4,43 4,21.603 7.188,18.415 36.652,18.415 37.567,19.329 68.936,19.329 69.469,18.796 v1(78.359,18.796) ; U1.8 71.626,37.096 74.05,34.672 74.05,34.086 76.696,31.44 76.696,30.746 v1(76.708,30.734)
  Bottom Layer w0.254: v1(76.708,30.734) 76.708,30.607 78.359,28.956 v1(78.359,18.796)
NetR6_2: R6.2 U1.7 | length 115
  Top Layer w0.254: R6.2 5.308,41.808 4.5,41 4.5,22.653 7.95,19.202 36.043,19.202 36.855,20.015 76.804,20.015 77.236,20.447 v1(77.343,20.447) ; U1.7 70.721,36.599 71.449,36.599 71.45,36.6 72.982,35.068 72.982,34.458 73.914,33.526 73.914,30.607 75.311,29.21 v1(76.454,29.21)
  Bottom Layer w0.254: v1(76.454,29.21) 77.343,28.321 v1(77.343,20.447)
NetR8_2: R8.2 U1.11 | length 116.8
  Top Layer w0.254: R8.2@6.073,39.078 R8.2 5.869,39.294 5.294,39.294 5,39 5,23.5 8.561,19.939 33.68,19.939 34.265,20.523 76.248,20.523 77.467,21.742 v1(79.172,21.742) ; U1.11 71.89,38.596 72.867,39.573 v1(73.254,39.573)
  Bottom Layer w0.254: v1(73.254,39.573) 73.254,36.761 79.172,30.843 v1(79.172,21.742)
NetR11_2: R11.2 R13.2 Y1.3 | length 16.5
  Top Layer w0.3: v1(73.025,44.577) R11.2 ; v1(74.422,37.719) 74.492,37.649 76.969,37.649 Y1.3 77.026,36.893 78.359,35.56 78.867,35.56 79.502,34.925 79.502,34.276 R13.2
  Bottom Layer w0.3: v1(73.025,44.577) 74.422,43.18 v1(74.422,37.719)
NetR16_2: R16.2 U1.24 | length 7.3
  Top Layer w0.3: R16.2 64.77,35.179 66.187,36.596 U1.24
nINT/REFCLKO: R10.1 U1.14 | length 6.2
  Top Layer w0.3: U1.14 69.533,40.755 69.723,40.945 R10.1
nRST: C7.2 R15.1 U1.15 | length 8.9
  Top Layer w0.3: R15.1 65.621,45.936 C7.2 67.691,43.307 69.033,41.965 U1.15
RD_N: P1.6 R4.1 U1.22 | length 42.5
  Top Layer w0.294: 65.163,37.596 U1.22
  Top Layer w0.3: R4.1 49.936,25.643 v1(49.936,24.079) ; 62.576,36.629 63.465,36.629 64.433,37.596 65.163,37.596
  Bottom Layer w0.3: P1.6 49.348,18.045 48.749,18.045 48.57,18.224 48.57,22.713 ; v1(49.936,24.079) 48.57,22.713 ; v1@62.189,37.014 62.189,37.132 60.915,38.405 50.698,38.405 48.57,36.277 48.57,22.713
  other v1: 62.255,36.703
RD_P: P1.3 R3.1 U1.23 | length 46.8
  Top Layer w0.3: R3.1 46.634,25.502 v1(46.634,23.978) ; v1(65.024,36.678) 65.024,36.746 65.374,37.096 U1.23
  Bottom Layer w0.3: P1.3 45.962,15.295 48.067,17.401 48.067,22.545 ; v1(46.634,23.978) 48.067,22.545 ; v1(65.024,36.678) 63.354,36.678 61.124,38.908 50.49,38.908 48.067,36.485 48.067,22.545
RXD0: MD1.10 R5.1 | length 8.8
  Top Layer w0.4: R5.1 7.873,44.196 12.827,44.196 13.193,43.83 MD1.10@16.5,43.83
RXD1: MD1.11 R6.1 | length 9
  Top Layer w0.4: R6.1 10.82,41.808 11.572,42.56 MD1.11@16.5,42.56
RXER: R7.2 U1.10 | length 7.6
  Top Layer w0.3: U1.10 70.722,38.1 73,38.1 76.048,41.148 R7.2
SCL: MD1.8 OLED1.3 R22.2 U3.6 | length 113.8
  Top Layer w0.3: v1(36.425,48.057) 46.468,48.057 v1(46.5,48.025) ; OLED1.3 48.89,51.69 78.899,51.69 79.535,51.054 v1(79.629,51.054) ; v1(80.391,45.974) 81.901,45.974 R22.2 82.04,45.863 U3.6
  Top Layer w0.4: v1(13.925,46.355) MD1.8 MD1.8@15.824,46.424
  Bottom Layer w0.3: v1(13.925,46.355) 13.925,45.71 14.294,45.341 14.294,29.456 15.658,28.092 32.106,28.092 36.425,32.412 v1(36.425,48.057) ; v1(46.5,48.025) 46.625,48.025 47.75,49.15 OLED1.3 ; v1(79.629,51.054) 80.391,50.292 v1(80.391,45.974)
SDA: MD1.9 OLED1.4 R23.2 U3.1 | length 123.4
  Top Layer w0.3: v1(37.5,49.5) 44.245,49.5 45.25,50.505 OLED1.4 46.948,52.273 87.554,52.273 89.027,50.8 R23.2 88.997,45.863 U3.1
  Top Layer w0.4: v1(13.614,45.06) 13.627,45.072 15.88,45.072 MD1.9
  Bottom Layer w0.3: v1(13.614,45.06) 13.614,28.427 14.597,27.445 32.88,27.445 37.5,32.064 v1(37.5,49.5)
TD_N: P1.2 R2.1 U1.20 | length 53.1
  Top Layer w0.25: 65.596,38.599 65.599,38.596 U1.20
  Top Layer w0.3: R2.1 45.466,38.76 44.237,39.989 43.983,39.989 v1(43.917,40.056) 43.917,40.15 43.744,40.323 43.744,40.837 43.919,41.013 60.54,41.013 62.753,38.8 64.097,38.8 64.224,38.928 65.267,38.928 65.596,38.599
  Bottom Layer w0.3: v1(43.917,40.056) 43.917,39.961 43.744,39.788 43.744,28.726 43.254,28.236 43.254,17.028 43.43,16.852 43.678,16.852 44.478,17.652 P1.2
TD_P: P1.1 R1.1 U1.21 | length 59.1
  Top Layer w0.3: R1.1 41.529,38.811 42.707,39.989 43.001,39.989 v1(43.067,40.056) 43.067,40.15 43.24,40.323 43.24,41.045 43.711,41.516 60.748,41.516 62.961,39.303 63.888,39.303 64.064,39.479 64.064,39.727 v1(62.957,40.834) ; v1(64.008,38.125) 64.037,38.096 U1.21
  Bottom Layer w0.3: v1(43.067,40.056) 43.067,39.961 43.24,39.788 43.24,28.934 42.751,28.445 42.751,16.82 43.302,16.268 43.302,15.389 P1.1 ; v1(62.957,40.834) 62.957,39.176 v1(64.008,38.125)
TX_EN: MD1.33 U1.16 | length 42.4
  Top Layer w0.3: MD1.33 32.968,48.82 62.282,48.82 v1(62.357,48.895) ; v1(64.25,43.5) 66.355,43.5 68.533,41.322 U1.16
  Bottom Layer w0.3: v1(62.357,48.895) 62.357,45.393 v1(64.25,43.5)
TXD0: MD1.31 U1.17 | length 39.4
  Top Layer w0.3: MD1.31@33.636,46.386 41.143,46.386 v1(41.529,46) ; v1(41.529,43.053) 41.832,42.75 65.979,42.75 67.353,41.376 67.353,41.359 68.033,40.679 U1.17
  Bottom Layer w0.3: v1(41.529,43.053) v1(41.529,46)
TXD1: MD1.36 U1.18 | length 46.3
  Top Layer w0.275: v1(66.167,41.275) 66.268,41.275 66.729,40.814 67.136,40.814 67.526,40.424 67.526,39.789 U1.18
  Top Layer w0.3: MD1.36@33.5,52.72 35.702,52.72 36.525,53.543 v1(63.83,53.543)
  Bottom Layer w0.3: v1(63.83,53.543) 63.83,45.136 66.167,42.799 v1(66.167,41.275)
pads on no net: J1.2 J1.3 J1.4 J1.6 J1.7 J1.8 J1.9 J1.10 J1.11 MD1.4 MD1.5 MD1.6 MD1.7 MD1.17 MD1.18 MD1.19 MD1.20 MD1.21 MD1.22 MD1.27 MD1.28 MD1.29 MD1.32 MD1.GND P1. SW1. SW2. U3.3 U3.4 U3.7 Y1.1

## Polygon pours and split planes (outlines as drawn)
GND on Bottom Layer "Bottom Layer-GND" (solid, pour order 48): 5.918,56.947 2.819,53.848 2.642,53.848 2.642,3.099 5.537,0.203 93.32,0.203 96.317,3.2 96.317,53.899 93.243,56.972 5.969,56.972
GND on Top Layer "Top Layer-GND" (solid, pour order 52): 5.918,56.972 2.743,53.797 2.667,53.797 2.667,3.048 5.486,0.229 93.37,0.229 96.342,3.2 96.317,3.226 96.317,54.051 96.266,54.051 93.345,56.972 93.269,56.896 5.994,56.896

## Keep-outs
Top Layer:
  lines w0.1: 74.15,57.15 93.118,57.101 ; 93.11,57.101 cw(c93.11,53.686) 96.525,53.686 96.525,3.592 cw(c92.983,3.592) 92.983,0.05 5.973,0.05 cw(c5.973,3.498) 2.525,3.498 2.525,53.542 cw(c6.083,53.542) 6.083,57.1 93.173,57.1

## Silkscreen, mask and mechanical layers (free items; w line width, h text height)
Top Overlay:
  drawing of 3 lines, arcs and shapes, not listed
  text "ERR" at 94.792,28.201 h10 r90
  text "Z" at 94.792,24.501 h14 r90
  text "FFE" at 72.466,9.55 h3
  text "MICRO" at 94.792,9.501 h10 r90
  text "MicroGate-08.12.20-V1.0-W.B.E.O" at 59.614,0.864 h1.91
Mechanical 1:
  lines w0.1: 2.54,53.848 cw(c6.11,53.517) 5.969,57.099 93.3,57.125 cw(c93.083,53.717) 96.498,53.698 96.5,3.5 cw(c93.001,3.55) 93,0.05 5.875,0 cw(c6.107,3.553) 2.55,3.4 2.54,53.848

## Text inside footprints (layer, text, board x,y; h text height)
J1: Mechanical 1 "PCB EDGE" at 10.756,0.127 h1.14